# Altium PCB attenuator-pcb.PcbDoc
Units mm, origin at the board's own origin, x right, y up, seen from the top; angles counter-clockwise.
Board outline 98.3 x 99.06 mm, 2 copper layers (Top Layer, Bottom Layer), stack 1.56 mm thick; 55 components, 37 nets, 185 pads, 214 vias.
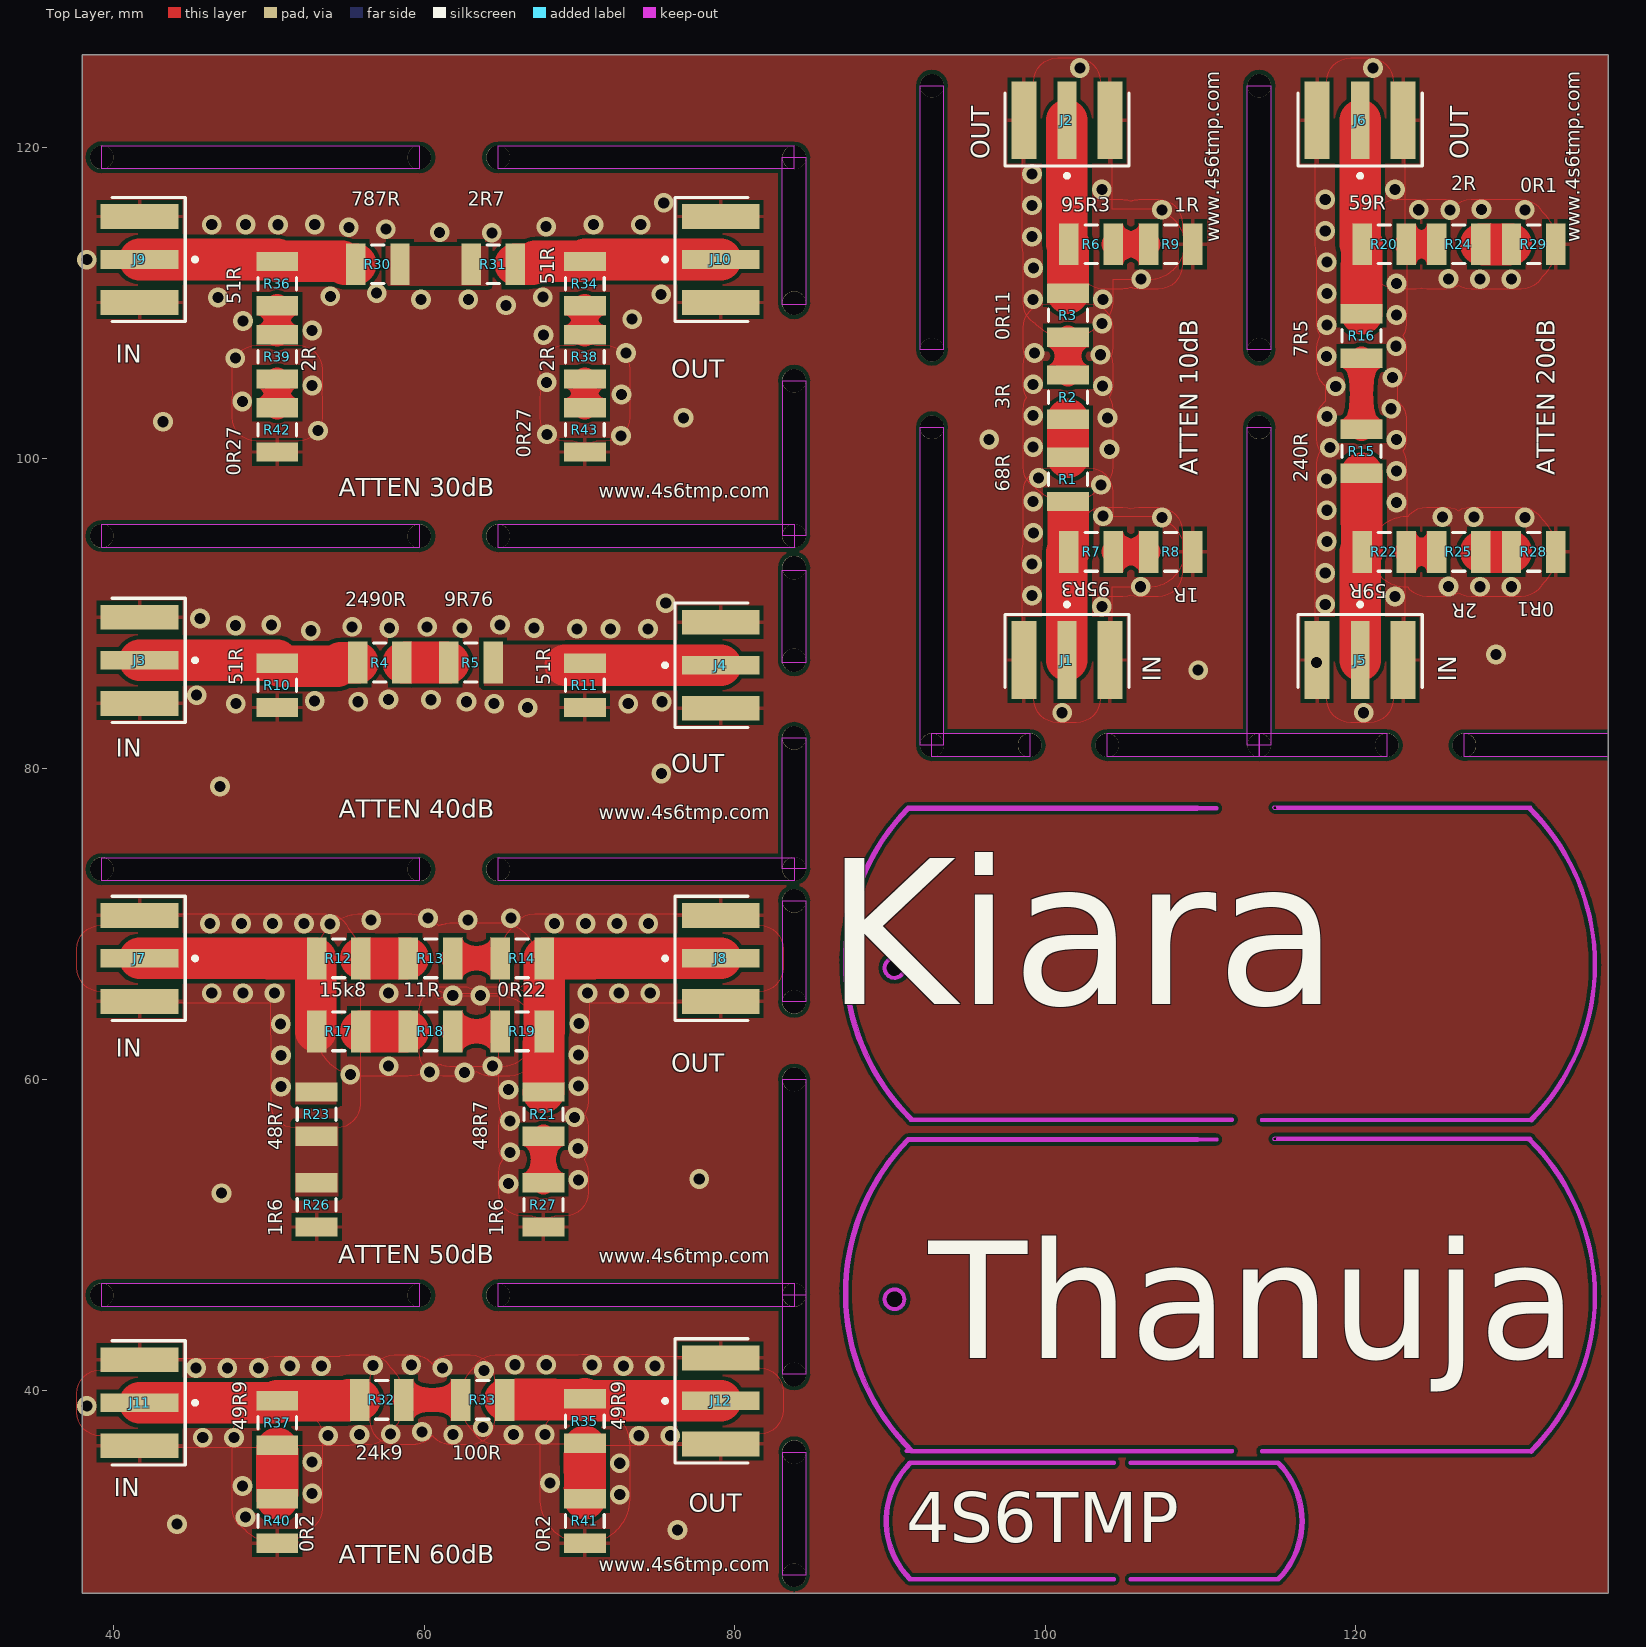
[diagram p0: Top Layer view]
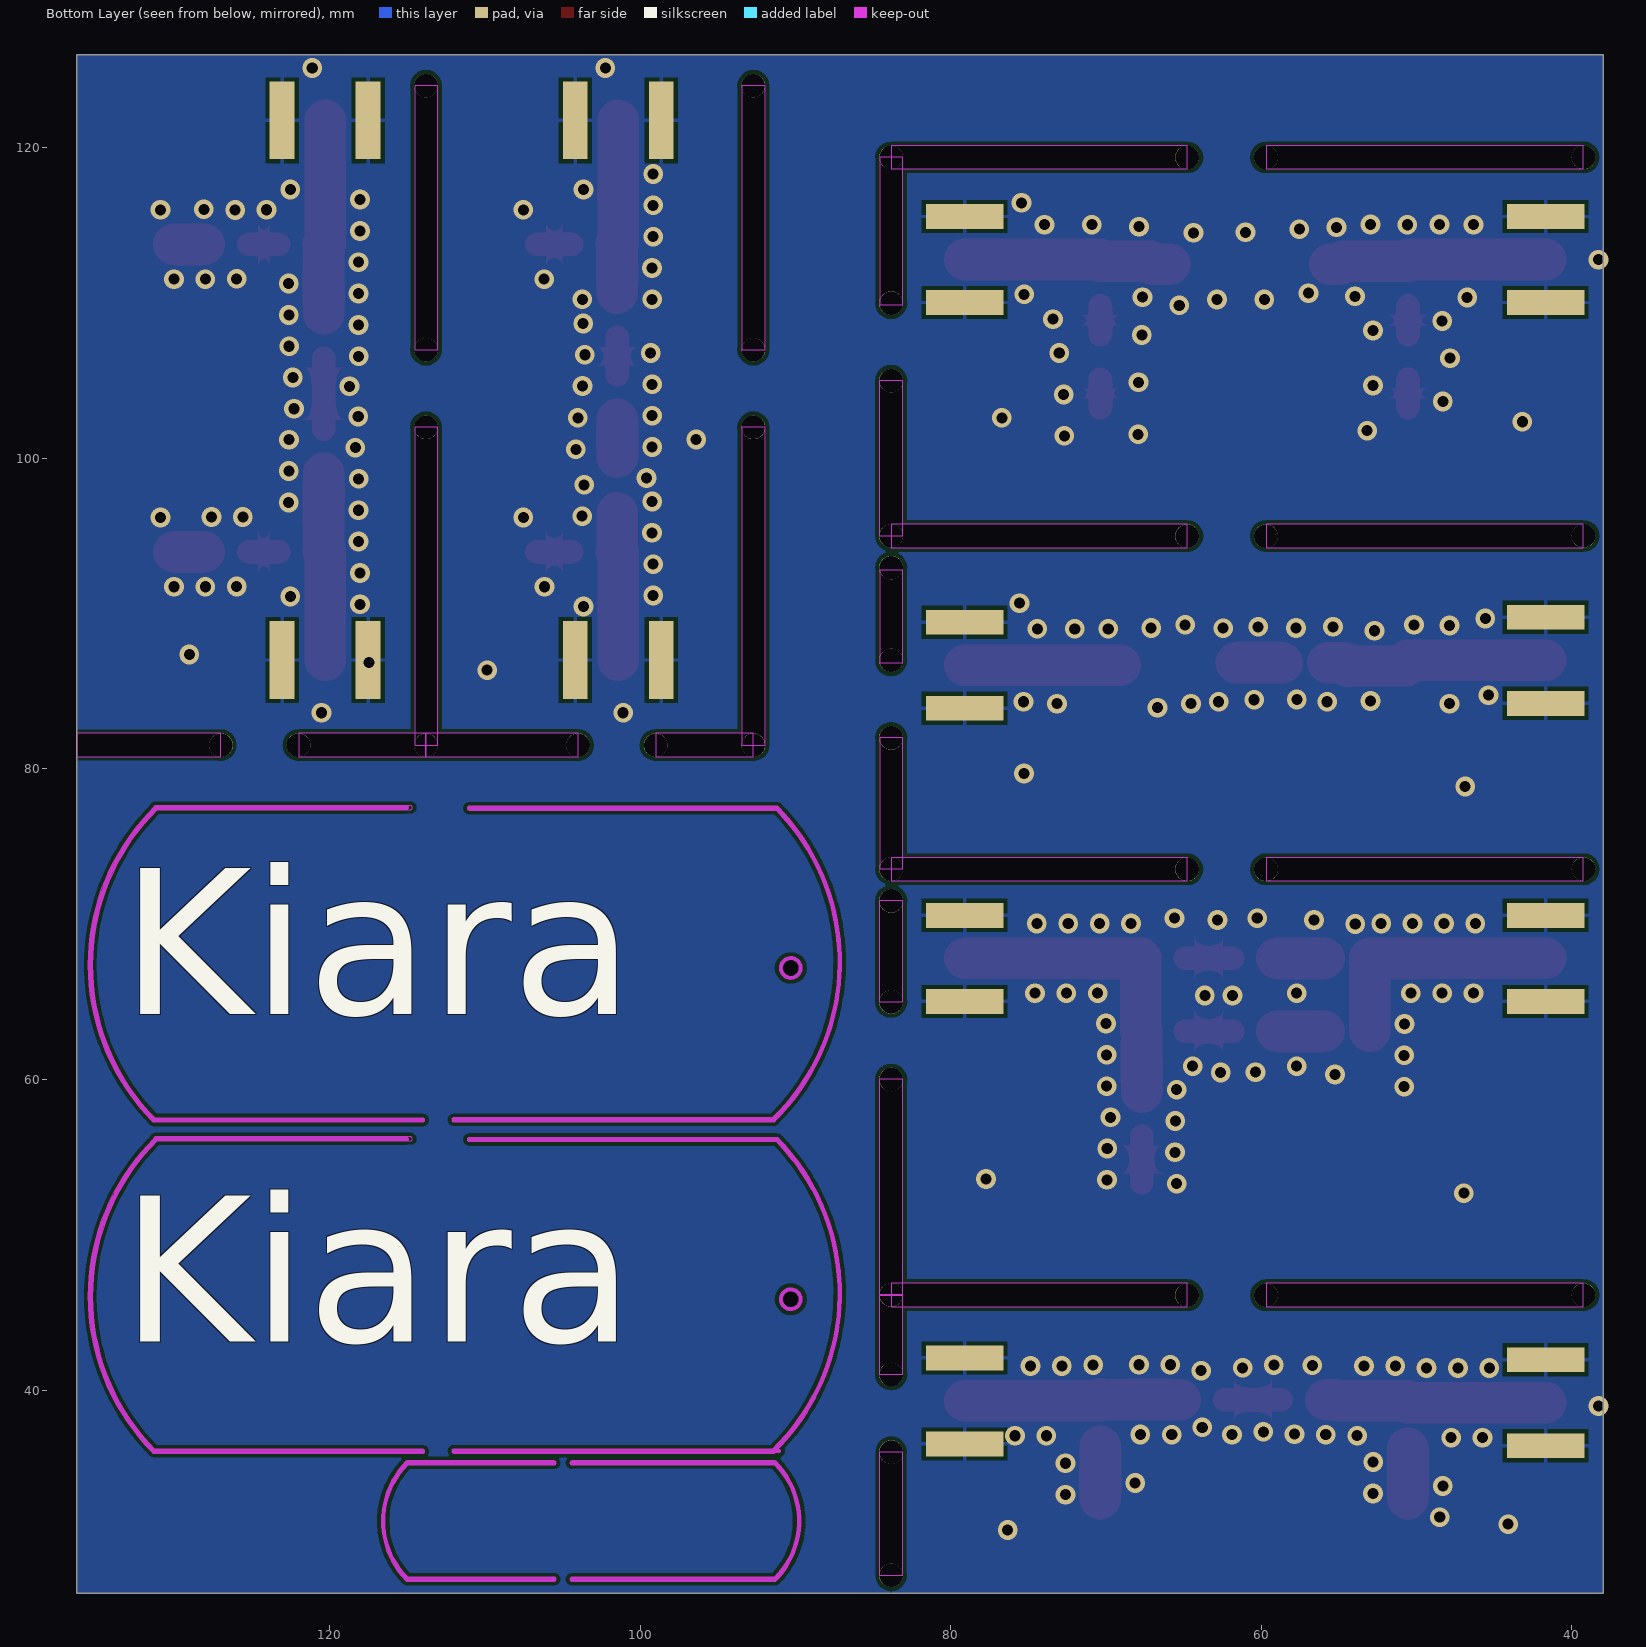
[diagram p1: Bottom Layer view, seen from below]

## Layer stack, top to bottom
Top Solder: solder mask 0.0203, Solder Resist, Dk 3.8
Top Layer: signal copper 0.035
Prepreg 7628: dielectric 1.49, FR-4, Dk 4.6
Bottom Layer: signal copper 0.035
Bottom Solder: solder mask 0.0203, Solder Resist, Dk 3.8

## Board outline
37.973,26.924 136.271,26.924 136.271,125.984 37.973,125.984
cut-out: 84.594,60 84.594,46.113 83.094,46.113 83.094,60
cut-out: 84.582,82 84.582,73.557 83.082,73.557 83.082,82
cut-out: 84.582,119.392 84.582,109.884 83.082,109.884 83.082,119.392
cut-out: 105.537,27.686 cw(c105.537,27.813) 105.537,27.94 114.947,27.94 ccw(c111.254,31.559) 116.424,31.559 ccw(c111.254,31.559) 114.947,35.179 105.537,35.179 cw(c105.537,35.306) 105.537,35.433 115,35.433 cw(c115,35.306) 115.09,35.396 cw(c111.254,31.559) 116.679,31.559 cw(c111.254,31.559) 115.09,27.723 cw(c115,27.813) 115,27.686
cut-out: 91.223,27.723 cw(c95.059,31.559) 91.223,35.396 cw(c91.313,35.306) 91.313,35.433 104.394,35.433 cw(c104.394,35.306) 104.521,35.306 cw(c104.394,35.306) 104.394,35.179 91.366,35.179 ccw(c95.059,31.559) 91.366,27.94 104.394,27.94 cw(c104.394,27.813) 104.521,27.813 cw(c104.394,27.813) 104.394,27.686 91.313,27.686 cw(c91.313,27.813)
cut-out: 91.334,35.977 cw(c101.337,46.219) 91.095,56.223 cw(c91.186,56.134) 91.313,56.134 cw(c91.186,56.134) 91.277,56.045 ccw(c101.337,46.219) 91.512,36.159 cw(c91.423,36.068) 91.55,36.068 cw(c91.423,36.068)
cut-out: 91.334,35.977 cw(c101.337,46.219) 91.095,56.223 cw(c91.186,56.134) 91.313,56.134 cw(c91.186,56.134) 91.277,56.045 ccw(c101.337,46.219) 91.512,36.159 cw(c91.423,36.068) 91.55,36.068 cw(c91.423,36.068)
cut-out: 131.227,36.158 ccw(c131.318,36.068) 131.409,35.979 ccw(c121.221,46.038) 135.538,46.038 ccw(c121.221,46.038) 131.28,56.225 ccw(c131.191,56.134) 131.102,56.043 cw(c121.221,46.038) 135.283,46.038 cw(c121.221,46.038)
cut-out: 91.186,56.007 109.8,56.007 ccw(c109.8,56.134) 109.927,56.134 ccw(c109.8,56.134) 109.8,56.261 91.186,56.261 ccw(c91.186,56.134)
cut-out: 114.8,56.044 cw(c114.8,56.171) 114.8,56.298 131.209,56.298 cw(c131.209,56.171) 131.337,56.171 cw(c131.209,56.171) 131.209,56.044
cut-out: 91.265,36.045 cw(c101.337,46.219) 91.095,56.223 cw(c91.186,56.134) 91.186,56.261 111,56.261 cw(c111,56.134) 111.127,56.134 cw(c111,56.134) 111,56.007 91.24,56.007 ccw(c101.337,46.219) 91.475,36.195 112.004,36.195 cw(c112.004,36.068) 112.131,36.068 cw(c112.004,36.068) 112.004,35.941 91.39,35.941 cw(c91.39,36.068)
cut-out: 114,35.926 cw(c114,36.053) 114,36.18 131.318,36.18 cw(c131.318,36.053) 131.445,36.053 cw(c131.318,36.053) 131.318,35.926
cut-out: 89.662,45.847 ccw(c90.297,45.847) 90.297,45.212 ccw(c90.297,45.847) 90.932,45.847 ccw(c90.297,45.847) 90.297,46.482 ccw(c90.297,45.847)
cut-out: 89.662,67.183 ccw(c90.297,67.183) 90.297,66.548 ccw(c90.297,67.183) 90.932,67.183 ccw(c90.297,67.183) 90.297,67.818 ccw(c90.297,67.183)
cut-out: 114,57.262 cw(c114,57.389) 114,57.516 131.318,57.516 cw(c131.318,57.389) 131.445,57.389 cw(c131.318,57.389) 131.318,57.262
cut-out: 91.265,57.381 cw(c101.337,67.555) 91.095,77.559 cw(c91.186,77.47) 91.186,77.597 111,77.597 cw(c111,77.47) 111.127,77.47 cw(c111,77.47) 111,77.343 91.24,77.343 ccw(c101.337,67.555) 91.475,57.531 112.004,57.531 cw(c112.004,57.404) 112.131,57.404 cw(c112.004,57.404) 112.004,57.277 91.39,57.277 cw(c91.39,57.404)
cut-out: 114.8,77.38 cw(c114.8,77.507) 114.8,77.634 131.209,77.634 cw(c131.209,77.507) 131.337,77.507 cw(c131.209,77.507) 131.209,77.38
cut-out: 91.186,77.343 109.8,77.343 ccw(c109.8,77.47) 109.927,77.47 ccw(c109.8,77.47) 109.8,77.597 91.186,77.597 ccw(c91.186,77.47)
cut-out: 131.227,57.494 ccw(c131.318,57.404) 131.409,57.315 ccw(c121.221,67.374) 135.538,67.374 ccw(c121.221,67.374) 131.28,77.561 ccw(c131.191,77.47) 131.102,77.379 cw(c121.221,67.374) 135.283,67.374 cw(c121.221,67.374)
cut-out: 91.334,57.313 cw(c101.337,67.555) 91.095,77.559 cw(c91.186,77.47) 91.313,77.47 cw(c91.186,77.47) 91.277,77.381 ccw(c101.337,67.555) 91.512,57.495 cw(c91.423,57.404) 91.55,57.404 cw(c91.423,57.404)
cut-out: 91.334,57.313 cw(c101.337,67.555) 91.095,77.559 cw(c91.186,77.47) 91.313,77.47 cw(c91.186,77.47) 91.277,77.381 ccw(c101.337,67.555) 91.512,57.495 cw(c91.423,57.404) 91.55,57.404 cw(c91.423,57.404)
cut-out: 91.397,36.094
cut-out: 91.397,57.43
cut-out: 84.594,46.125 84.594,41 83.094,41 83.094,46.125
cut-out: 104,82.296 113.792,82.296 113.792,80.796 104,80.796
cut-out: 113.792,82.296 122,82.296 122,80.796 113.792,80.796
cut-out: 127,82.296 136.271,82.296 136.271,80.796 127,80.796
cut-out: 92.71,82.296 99,82.296 99,80.796 92.71,80.796
cut-out: 84.594,36 84.594,28.067 83.094,28.067 83.094,36
cut-out: 84.594,71.501 84.594,65 83.094,65 83.094,71.501
cut-out: 84.582,92.795 84.582,86.826 83.082,86.826 83.082,92.795
cut-out: 84.594,105 84.594,95.02 83.094,95.02 83.094,105
cut-out: 113.03,81.534 113.03,102 114.53,102 114.53,81.534
cut-out: 113.03,107 113.03,124 114.53,124 114.53,107
cut-out: 91.948,81.534 91.948,102 93.448,102 93.448,81.534
cut-out: 91.948,107 91.948,124 93.448,124 93.448,107
cut-out: 39.243,46.863 59.69,46.863 59.69,45.363 39.243,45.363
cut-out: 64.77,46.863 83.832,46.863 83.832,45.363 64.77,45.363
cut-out: 39.243,74.295 59.69,74.295 59.69,72.795 39.243,72.795
cut-out: 64.77,74.295 83.832,74.295 83.832,72.795 64.77,72.795
cut-out: 39.243,95.758 59.69,95.758 59.69,94.258 39.243,94.258
cut-out: 64.77,95.758 83.832,95.758 83.832,94.258 64.77,94.258
cut-out: 64.77,120.142 83.82,120.142 83.82,118.642 64.77,118.642
cut-out: 39.243,120.142 59.69,120.142 59.69,118.642 39.243,118.642

## Design rules (kind name [scope] priority, off if disabled: settings)
Clearance [All] p1: gap=0.254 ignorepadtopadclearanceinfootprint=FALSE except(0: Arc-Hole Track-Hole SMDPad-Hole THPad-Hole Via-Hole Fill-Hole Poly-Hole Region-Hole Text-Hole)
HoleToHoleClearance [All] p1: gap=0.1 allowstackedmicrovias=TRUE
MinimumSolderMaskSliver [All] p1 off: minsoldermaskwidth=0.1
PolygonConnect [All] p1: connectstyle=Relief reliefconductorwidth=0.254 reliefentries=4 polygonreliefangle="90 Angle" airgapwidth=0.254
RoomDefinition schematic [InComponentClass('schematic')] p1: confinementstyle=ConfineIn formatcopy=TRUE lockcomponents=FALSE outline 28.829,26.779 136.271,26.779 136.271,135.128 28.829,135.128
RoutingVias [All] p1: holewidth=0.711 width=1.27 viastyle="Through Hole" minholewidth=0.711 minwidth=1.27 maxholewidth=0.711 maxwidth=1.27
SolderMaskExpansion [All] p1: expansion=0.102 istentingtop=FALSE
Width [All] p1: maxlimit=3 minlimit=1.5 preferedwidth=2.673 impedanceprofiledriven=TRUE impedanceprofileid={88FF0C83-8680-40BB-AEE6-F79FA2882ED4} impedanceprofilevalue=50.000000 minimp=50.000000 maximp=50.000000 favimp=50.000000
Width Width_1 [All] p2: maxlimit=2 minlimit=0.254 preferedwidth=1 minimp=50.000000 maximp=50.000000 favimp=50.000000
28 further rules are at their usual default settings.

## Components (designator, comment, footprint, x,y, rotation, side; value= is the part's Value field where it differs from the comment)
J1 "IN" FP-CON-SMA-EDGE-S-MFG 101.405,79.756 r180 top
J2 "OUT" FP-CON-SMA-EDGE-S-MFG 101.405,129.032 r0 top
J3 "IN" FP-CON-SMA-EDGE-S-MFG 34.417,86.995 r90 top
J4 "OUT" FP-CON-SMA-EDGE-S-MFG 86.36,86.679 r270 top
J5 "IN" FP-CON-SMA-EDGE-S-MFG 120.285,79.756 r180 top
J6 "OUT" FP-CON-SMA-EDGE-S-MFG 120.285,129.032 r0 top
J7 "IN" FP-CON-SMA-EDGE-S-MFG 34.417,67.8 r90 top
J8 "OUT" FP-CON-SMA-EDGE-S-MFG 86.36,67.8 r270 top
J9 "IN" FP-CON-SMA-EDGE-S-MFG 34.417,112.811 r90 top
J10 "OUT" FP-CON-SMA-EDGE-S-MFG 86.36,112.811 r270 top
J11 "IN" FP-CON-SMA-EDGE-S-MFG 34.417,39.175 r90 top
J12 "OUT" FP-CON-SMA-EDGE-S-MFG 86.36,39.298 r270 top
R1 "68R" RESC3225X70X50NL20T20 101.473,98.651 r90 top
R2 "3R" RESC3225X70X50NL20T20 101.473,103.95 r90 top
R3 "0R11" RESC3225X70X50NL20T20 101.473,109.22 r90 top
R4 "2490R" RESC3225X70X50NL20T20 57.15,86.851 r0 top
R5 "9R76" RESC3225X70X50NL20T20 63.02,86.851 r0 top
R6 "95R3" RESC3225X70X50NL20T20 102.957,113.792 r180 top
R7 "95R3" RESC3225X70X50NL20T20 102.957,93.98 r180 top
R8 "1R" RESC3225X70X50NL20T20 108.091,93.98 r180 top
R9 "1R" RESC3225X70X50NL20T20 108.091,113.792 r180 top
R10 "51R" RESC3225X70X50NL20T20 50.546,85.381 r90 top
R11 "51R" RESC3225X70X50NL20T20 70.358,85.381 r90 top
R12 "15k8" RESC3225X70X50NL20T20 54.511,67.8 r0 top
R13 "11R" RESC3225X70X50NL20T20 60.417,67.8 r0 top
R14 "0R22" RESC3225X70X50NL20T20 66.322,67.8 r0 top
R15 "240R" RESC3225X70X50NL20T20 120.376,100.457 r90 top
R16 "7R5" RESC3225X70X50NL20T20 120.376,107.888 r90 top
R17 "15k8" RESC3225X70X50NL20T20 54.511,63.101 r0 top
R18 "11R" RESC3225X70X50NL20T20 60.417,63.101 r0 top
R19 "0R22" RESC3225X70X50NL20T20 66.322,63.101 r0 top
R20 "59R" RESC3225X70X50NL20T20 121.837,113.792 r180 top
R21 "48R7" RESC3225X70X50NL20T20 67.691,57.767 r90 top
R22 "59R" RESC3225X70X50NL20T20 121.837,93.98 r180 top
R23 "48R7" RESC3225X70X50NL20T20 53.086,57.767 r90 top
R24 "2R" RESC3225X70X50NL20T20 126.635,113.792 r180 top
R25 "2R" RESC3225X70X50NL20T20 126.635,93.98 r180 top
R26 "1R6" RESC3225X70X50NL20T20 53.086,51.925 r90 top
R27 "1R6" RESC3225X70X50NL20T20 67.691,51.925 r90 top
R28 "0R1" RESC3225X70X50NL20T20 131.461,93.98 r180 top
R29 "0R1" RESC3225X70X50NL20T20 131.461,113.792 r180 top
R30 "787R" RESC3225X70X50NL20T20 57.023,112.506 r0 top
R31 "2R7" RESC3225X70X50NL20T20 64.454,112.506 r0 top
R32 "24k9" RESC3225X70X50NL20T20 57.277,39.37 r0 top
R33 "100R" RESC3225X70X50NL20T20 63.782,39.37 r0 top
R34 "51R" RESC3225X70X50NL20T20 70.358,111.259 r90 top
R35 "49R9" RESC3225X70X50NL20T20 70.358,38 r90 top
R36 "51R" RESC3225X70X50NL20T20 50.546,111.259 r90 top
R37 "49R9" RESC3225X70X50NL20T20 50.546,37.877 r90 top
R38 "2R" RESC3225X70X50NL20T20 70.358,106.537 r90 top
R39 "2R" RESC3225X70X50NL20T20 50.546,106.537 r90 top
R40 "0R2" RESC3225X70X50NL20T20 50.546,31.564 r90 top
R41 "0R2" RESC3225X70X50NL20T20 70.358,31.564 r90 top
R42 "0R27" RESC3225X70X50NL20T20 50.546,101.838 r90 top
R43 "0R27" RESC3225X70X50NL20T20 70.358,101.838 r90 top

## Footprints (in the part's own frame and the unit in brackets; to place one, negate y for a bottom-side part, rotate by r counter-clockwise, add the part's x,y. Pads: shape width x height; smd on the part's side, far side on the other; paste and mask are expansions set on the pad)
FP-CON-SMA-EDGE-S-MFG [mm]
  rect 1.2x5 smd paste+0 mask+0: 1(0,-7.26)
  rect 1.6x5 smd paste+0 mask+0: 2(-2.77,-7.26) 3(2.77,-7.26)
  rect 1.6x5 smd far side paste+0 mask+0: 4(-2.77,-7.26) 5(2.77,-7.26)
  silkscreen extent -4,-10.96 4,-5.5, body extent -3.67,-9.86 3.67,4.86, height 0.25
RESC3225X70X50NL20T20 [mm] "Chip Resistor, 2-Leads, Body 3.20x2.50mm, IPC Medium Density"
  rect 1.25x2.7 smd: 1(-1.425,0) 2(1.425,0)
  silkscreen extent -0.4,-1.25 0.4,1.25, body extent -1.7,-1.35 1.7,1.35, height 0.7

## Part data
J1 J2 J3 J4 J5 J6 J7 J8 J9 J10 J11 J12: library part CMP-204357-000001-1, "CONN SMA JACK STR EDGE MNT", Frequency=18GHz, Manufacturer="RF Solutions Ltd.", Manufacturer Part Number=CON-SMA-EDGE-S, Package=CONN_JACK, Automotive=No, Category=Conn, ComponentLink2Description=Datasheet, ComponentLink2URL=https://www.rfsolutions.co.uk/downloads/1498648656DS-CON-EDGE-SMA-4.pdf, Conn Orientation="Right Angle", Contact Material=Gold, Device Class L1=Connectors, Device Class L2="RF / Coaxial Connectors", Device Class L3=unset, Digikey Description="CONN SMA JACK STR EDGE MNT", Footprint Url=https://forum.upverter.com/uploads/default/original/3X/b/e/be75b907af57498775929d6d9099689c472e0307.pdf, Height=6.35mm, Impedance=50Ω, Is Female=yes, Lead Free=Yes, Number Of Contacts=1, Octopart=https://octopart.com/con-sma-edge-s-rf+solutions-70967450, RoHS=TRUE, Shielding=true
R1 R2 R3 R4 R5 R6 R7 R8 R9 R10 R11 R12 R13 R14 R15 R16 R17 R18 R19 R20 R21 R22 R23 R24 R25 R26 R27 R28 R29 R30 R31 R32 R33 R34 R35 R36 R37 R38 R39 R40 R41 R42 R43: library part CMP-2005-01957-1, Manufacturer=Panasonic, Part Number=ERJ-14NF1001U

## Free pads (board coordinates)
  round 1.524 hole 1.524 unplated mask+0: 5(39.243,46.113) 5(39.243,73.545) 5(39.243,95.008) 5(39.243,119.392) 5(59.69,46.101) 5(59.69,73.533) 5(59.69,94.996) 5(59.69,119.38) 5(64.77,46.101) 5(64.77,73.533) 5(64.77,94.996) 5(64.77,119.38) 5(83.832,28.067) 5(83.832,36) 5(83.832,41) 5(83.832,46.125) 5(83.832,60) 5(83.832,65) 5(83.832,71.501) 5(83.832,73.557) 5(83.832,82) 5(83.832,87) 5(83.832,92.964) 5(83.832,95.02) 5(83.832,105) 5(83.832,110) 5(83.832,119.38) 5(92.71,81.534) 5(92.71,102) 5(92.71,107) 5(92.71,124) 5(99,81.534) 5(104,81.534) 5(113.792,81.534) 5(113.792,102) 5(113.792,107) 5(113.792,124) 5(122,81.534) 5(127,81.534)

## Via types
v1: diameter 1.27, hole 0.711, Top Layer to Bottom Layer, 214 vias

## Nets (pads, with @x,y where several pads share a name; then routed paths per layer and width w, separated by ;. In a path a pad name is that pad's centre, name@x,y a point inside that pad or via, vN(x,y) a via of type N, cw(c..) or ccw(c..) an arc to the next point about the centre after c; other vN are vias at no path point)
GND: J1.2 J1.3 J1.4 J1.5 J2.2 J2.3 J2.4 J2.5 J3.2 J3.3 J3.4 J3.5 J4.2 J4.3 J4.4 J4.5 J5.2 J5.3 J5.4 J5.5 J6.2 J6.3 J6.4 J6.5 J7.2 J7.3 J7.4 J7.5 J8.2 J8.3 J8.4 J8.5 J9.2 J9.3 J9.4 J9.5 J10.2 J10.3 J10.4 J10.5 J11.2 J11.3 J11.4 J11.5 J12.2 J12.3 J12.4 J12.5 R8.1 R9.1 R10.1 R11.1 R26.1 R27.1 R28.1 R29.1 R40.1 R41.1 R42.1 R43.1
  other v1: 76.327,30.988 44.091,31.362 48.5,31.812 72.603,33.262 52.793,33.342 48.301,33.822 68.113,34.007 72.603,35.282 52.791,35.362 45.747,36.931 47.767,36.931 53.823,37.057 73.84,37.054 75.86,37.054 55.842,37.123 61.875,37.123 65.761,37.123 67.781,37.139 57.849,37.153 59.863,37.308 63.797,37.593 38.28,38.974 63.866,41.247 45.308,41.42 47.328,41.42 49.348,41.42 61.194,41.431 51.364,41.547 53.384,41.547 72.843,41.543 74.863,41.543 56.709,41.586 59.183,41.617 70.824,41.616 65.849,41.628 67.869,41.628 46.95,52.675 65.444,53.292 69.938,53.535 77.724,53.594 65.548,55.309 69.916,55.554 65.529,57.329 69.704,57.563 65.444,59.347 50.792,59.535 69.949,59.568 55.253,60.326 62.611,60.452 60.363,60.473 57.717,60.856 64.415,60.854 50.792,61.555 69.949,61.588 50.764,63.575 69.992,63.608 61.849,65.405 63.627,65.405 46.326,65.555 48.346,65.555 50.366,65.555 57.717,65.555 70.529,65.555 72.549,65.555 74.569,65.555 53.943,70.016 46.211,70.045 48.231,70.045 50.251,70.045 52.271,70.045 68.387,70.045 70.407,70.045 72.427,70.045 74.447,70.045 56.596,70.277 62.821,70.276 60.253,70.387 65.587,70.387 46.863,78.867 75.28,79.705 101.095,83.619 120.514,83.619 66.675,83.947 47.879,84.201 64.516,84.201 73.152,84.201 55.753,84.328 62.738,84.328 75.311,84.328 52.955,84.369 60.452,84.455 57.705,84.477 45.359,84.75 109.855,86.36 117.475,86.868 129.032,87.376 52.705,88.9 69.85,89.027 72.009,89.027 74.422,89.027 57.764,89.073 62.452,89.067 67.09,89.082 55.372,89.154 60.198,89.154 47.867,89.24 50.165,89.281 64.897,89.281 45.567,89.688 103.65,90.469 118.041,90.605 75.565,90.678 122.53,91.108 99.161,91.171 106.157,91.733 125.986,91.753 128.006,91.733 130.026,91.733 118.041,92.625 99.161,93.191 118.145,94.642 99.242,95.209 107.523,96.196 130.893,96.196 125.59,96.227 127.61,96.227 103.731,96.279 118.145,96.662 122.635,97.166 99.226,97.229 103.601,98.295 118.13,98.682 99.584,98.744 122.623,99.186 104.14,100.584 118.34,100.691 99.228,100.733 122.616,101.206 96.393,101.219 72.678,101.456 67.922,101.551 53.174,101.784 43.18,102.362 76.708,102.616 104.013,102.616 118.156,102.703 99.226,102.753 122.286,103.198 48.299,103.671 72.718,104.117 103.708,104.661 118.718,104.643 52.793,104.695 99.226,104.773 67.898,104.899 122.37,105.217 47.847,106.458 118.13,106.576 103.564,106.675 73.006,106.786 99.318,106.791 122.605,107.223 67.691,107.95 52.793,108.233 118.142,108.596 103.672,108.693 48.343,108.852 73.406,108.966 122.627,109.243 65.278,109.855 59.801,110.228 62.849,110.228 99.226,110.242 103.72,110.245 46.736,110.363 67.652,110.383 53.964,110.439 75.268,110.566 118.145,110.616 56.951,110.645 122.635,111.263 106.184,111.545 125.986,111.565 128.006,111.545 130.026,111.545 99.242,112.262 118.145,112.636 38.28,112.802 99.161,114.28 64.367,114.531 61.007,114.562 118.041,114.653 57.542,114.763 55.157,114.879 67.866,114.929 50.591,115.048 46.325,115.055 48.514,115.062 52.959,115.062 70.908,115.055 73.956,115.055 107.523,116.008 126.084,116.001 130.893,116.008 124.064,116.015 128.104,116.039 99.161,116.3 75.438,116.459 118.041,116.673 103.65,117.32 122.53,117.32 99.161,118.32 102.238,125.138 121.118,125.138
NetJ1_1: J1.1 R1.1 R7.2 | length 9.6
  Top Layer w2.673: J1.1 101.405,93.966 101.419,93.98 R7.2@101.5,93.98 ; 101.487,96.515 101.487,93.994 R7.2@101.5,93.98 ; R7.2 R7.2@101.5,93.98
NetJ2_1: J2.1 R3.2 R6.2 | length 11.3
  Top Layer w2.673: J2.1 101.405,113.806 101.419,113.792 R6.2@101.5,113.792 ; R3.2 101.487,110.658 101.487,113.778 R6.2@101.5,113.792 ; R6.2 R6.2@101.5,113.792
NetJ3_1: J3.1 R4.1 R10.2 | length 14.4
  Top Layer w2.673: J3.1 50.532,86.995 50.546,86.981 50.546,86.824 R10.2 50.738,86.614 54.397,86.614 54.62,86.837 55.711,86.837 R4.1
NetJ4_1: J4.1 R5.2 R11.2 | length 10
  Top Layer w2.673: R11.2@69.088,86.679 J4.1
NetJ5_1: J5.1 R15.1 R22.2 | length 12.1
  Top Layer w2.673: J5.1 120.285,93.966 120.299,93.98 R22.2@120.403,93.98 ; R15.1 120.39,99.018 120.39,93.994 R22.2@120.403,93.98 ; R22.2 R22.2@120.403,93.98
NetJ6_1: J6.1 R16.2 R20.2 | length 12.6
  Top Layer w2.673: J6.1 120.285,113.806 120.299,113.792 R20.2@120.403,113.792 ; R16.2 120.39,109.326 120.39,113.778 R20.2@120.403,113.792 ; R20.2 R20.2@120.403,113.792
NetJ7_1: J7.1 R12.1 R17.1 R23.2 | length 16
  Top Layer w2.673: J7.1 52.995,67.8 53.009,67.786 R17.1@53.009,63.114
NetJ8_1: J8.1 R14.2 R19.2 R21.2 | length 20
  Top Layer w2.673: R21.2 67.705,59.205 67.705,63.087 67.718,63.101 R19.2 R14.2 J8.1
NetJ9_1: J9.1 R30.1 R36.2 | length 14
  Top Layer w2.673: J9.1 50.532,112.811 R36.2@50.546,112.797 ; R36.2 54.722,112.684 54.9,112.506 R30.1
NetJ10_1: J10.1 R31.2 R34.2 | length 13.4
  Top Layer w2.673: R31.2 65.893,112.519 66.984,112.519 67.148,112.684 R34.2 70.358,112.797 70.372,112.811 J10.1
NetJ11_1: J11.1 R32.1 R37.2 | length 14.3
  Top Layer w2.673: J11.1 50.532,39.175 50.546,39.189 R37.2 55.086,39.302 55.154,39.37 R32.1
NetJ12_1: J12.1 R33.2 R35.2 | length 14
  Top Layer w2.673: R33.2 65.22,39.384 70.344,39.384 R35.2@70.358,39.397 ; R35.2 R35.2@70.358,39.397 ; J12.1 70.372,39.298 70.358,39.312 R35.2@70.358,39.397
NetR1_2: R1.2 R2.1 | length 2.4
  Top Layer w2.673: R1.2 R2.1
NetR2_2: R2.2 R3.1 | length 2.4
  Top Layer w1.5: R2.2 R3.1
NetR4_2: R4.2 R5.1 | length 2.9
  Top Layer w2.673: R4.2@58.652,86.851 R5.1
NetR6_1: R6.1 R9.2 | length 2.3
  Top Layer w1.5: R6.1 R9.2
NetR7_1: R7.1 R8.2 | length 2.3
  Top Layer w1.5: R7.1 R8.2
NetR12_2: R12.2 R13.1 | length 3.1
  Top Layer w2.673: R12.2 R13.1
NetR13_2: R13.2 R14.1 | length 3.1
  Top Layer w1.5: R13.2 R14.1
NetR15_2: R15.2 R16.1 | length 4.6
  Top Layer w1.5: R15.2 R16.1
NetR17_2: R17.2 R18.1 | length 3.1
  Top Layer w2.673: R17.2 R18.1
NetR18_2: R18.2 R19.1 | length 3.1
  Top Layer w1.5: R18.2 R19.1
NetR20_1: R20.1 R24.2 | length 1.9
  Top Layer w1.5: R20.1 R24.2
NetR21_1: R21.1 R27.2 | length 3
  Top Layer w1.5: R27.2 R21.1
NetR22_1: R22.1 R25.2 | length 1.9
  Top Layer w1.5: R22.1 R25.2
NetR23_1: R23.1 R26.2
NetR24_1: R24.1 R29.2 | length 2
  Top Layer w2.673: R24.1 R29.2
NetR25_1: R25.1 R28.2 | length 2
  Top Layer w2.673: R25.1 R28.2
NetR30_2: R30.2 R31.1
NetR32_2: R32.2 R33.1 | length 3.7
  Top Layer w1.5: R32.2 R33.1
NetR34_1: R34.1 R38.2 | length 1.9
  Top Layer w1.5: R38.2 R34.1
NetR35_1: R35.1 R41.2 | length 3.4
  Top Layer w2.673: R41.2 R35.1@70.358,36.371
NetR36_1: R36.1 R39.2 | length 1.9
  Top Layer w1.5: R39.2 R36.1
NetR37_1: R37.1 R40.2 | length 3.3
  Top Layer w2.673: R40.2 R37.1@50.546,36.248
NetR38_1: R38.1 R43.2 | length 1.8
  Top Layer w1.5: R43.2 R38.1
NetR39_1: R39.1 R42.2 | length 1.8
  Top Layer w1.5: R42.2 R39.1

## Polygon pours and split planes (outlines as drawn)
GND on Top Layer "Top Layer-GND" (solid, remove dead copper, pour order 6): 37.973,26.924 136.271,26.924 136.271,125.984 37.973,125.984
GND on Top Layer "Top Layer-GND 14" (solid, pour order 15): 154 vertices, not listed, extent 62.326,36.414 83.136,42.306
GND on Top Layer "Top Layer-GND 2" (solid, pour order 28): 177 vertices, not listed, extent 120.972,91.094 132.917,96.866
GND on Top Layer "Top Layer-GND 3" (solid, pour order 27): 131 vertices, not listed, extent 120.972,110.906 132.917,116.678
GND on Top Layer "Top Layer-GND 4" (solid, pour order 26): 295 vertices, not listed, extent 117.401,82.98 123.293,125.808
GND on Top Layer "Top Layer-GND 5" (solid, pour order 25): 113 vertices, not listed, extent 102.092,110.906 108.956,116.678
GND on Top Layer "Top Layer-GND 6" (solid, pour order 24): 47 vertices, not listed, extent 102.221,91.094 108.828,96.866
GND on Top Layer "Top Layer-GND 7" (solid, pour order 23): 131 vertices, not listed, extent 98.587,97.195 104.359,110.085
GND on Top Layer "Top Layer-GND 8" (solid, pour order 22): 185 vertices, not listed, extent 98.521,82.98 108.956,99.396
GND on Top Layer "Top Layer-GND 9" (solid, pour order 21): 231 vertices, not listed, extent 98.521,107.764 108.956,125.808
GND on Top Layer "Top Layer-GND 10" (solid, pour order 20): 119 vertices, not listed, extent 47.66,30.108 53.432,39.13
GND on Top Layer "Top Layer-GND 11" (solid, pour order 19): 167 vertices, not listed, extent 67.473,30.108 73.243,39.253
GND on Top Layer "Top Layer-GND 12" (solid, pour order 18): 163 vertices, not listed, extent 56.412,36.484 64.647,42.256
GND on Top Layer "Top Layer-GND 13" (solid, pour order 16): 162 vertices, not listed, extent 37.641,36.291 58.733,42.256
GND on Top Layer "Top Layer-GND 15" (solid, pour order 12): 387 vertices, not listed, extent 53.055,60.216 67.187,70.684
GND on Top Layer "Top Layer-GND 16" (solid, pour order 11): 188 vertices, not listed, extent 64.805,51.06 83.136,70.686
GND on Top Layer "Top Layer-GND 17" (solid, pour order 14): 133 vertices, not listed, extent 59.552,60.214 67.187,65.987
GND on Top Layer "Top Layer-GND 18" (solid, pour order 10): 138 vertices, not listed, extent 37.641,56.884 55.894,70.686
GND on Top Layer "Top Layer-GND 19" (solid, pour order 9): 85 vertices, not listed, extent 67.472,100.973 73.244,107.402
GND on Top Layer "Top Layer-GND 1" (solid, pour order 7): 43 vertices, not listed, extent 47.66,101.101 53.432,107.273
NetJ4_1 on Top Layer "NETJ4_1_L01_P005" (solid, remove dead copper, pour order 5): 63.881,88.011 72.136,88.011 72.136,85.344 63.881,85.344
NetJ7_1 on Top Layer "NETJ7_1_L01_P004" (solid, remove dead copper, pour order 4): 54.356,65.151 54.356,58.42 51.689,58.42 51.689,65.151
NetR23_1 on Top Layer "NETR23_1_L01_P003" (solid, remove dead copper, pour order 3): 51.689,57.221 54.483,57.221 54.483,52.471 51.689,52.471
NetR30_2 on Top Layer "NETR30_2_L01_P002" (solid, remove dead copper, pour order 2): 57.531,113.665 64.135,113.665 64.135,111.125 57.531,111.125
GND on Bottom Layer "Top Layer-No Net" (solid, pour order 1): 37.973,26.924 136.271,26.924 136.271,125.984 37.973,125.984

## Keep-outs
Keep-Out Layer:
  circle w0.254: c90.297,45.847 r0.635
  circle w0.254: c90.297,67.183 r0.635
  pour cut-out: 131.227,36.158 ccw(c131.318,36.068) 131.409,35.979 ccw(c121.221,46.038) 135.538,46.038 ccw(c121.221,46.038) 131.28,56.225 ccw(c131.191,56.134) 131.102,56.043 cw(c121.221,46.038) 135.283,46.038 cw(c121.221,46.038)
  pour cut-out: 131.227,57.494 ccw(c131.318,57.404) 131.409,57.315 ccw(c121.221,67.374) 135.538,67.374 ccw(c121.221,67.374) 131.28,77.561 ccw(c131.191,77.47) 131.102,77.379 cw(c121.221,67.374) 135.283,67.374 cw(c121.221,67.374)
  lines w0.254: 91.059,36.068 104.14,36.068 ; 91.39,36.068 112.004,36.068 ; 91.39,57.404 112.004,57.404 ; 91.423,36.068 cw(c101.337,46.219) 91.186,56.134 111,56.134 ; 91.423,57.404 cw(c101.337,67.555) 91.186,77.47 111,77.47 ; 104.394,27.813 91.313,27.813 cw(c95.059,31.559) 91.313,35.306 104.394,35.306 ; 105.537,27.813 115,27.813 ccw(c111.254,31.559) 115,35.306 105.537,35.306 ; 114,36.053 131.318,36.053 ; 114,57.389 131.318,57.389 ; 115,56.171 131.209,56.171 ; 115,77.507 131.209,77.507 ; 131.191,56.134 cw(c121.221,46.038) 131.318,36.068 ; 131.191,77.47 cw(c121.221,67.374) 131.318,57.404

## Silkscreen, mask and mechanical layers (free items; w line width, h text height)
Top Overlay:
  text "www.4s6tmp.com" at 111.489,113.919 h1.52 r90
  text "www.4s6tmp.com" at 134.73,113.919 h1.52 r90
  text "ATTEN 10dB" at 110.222,98.925 h2 r90
  text "ATTEN 20dB" at 133.209,98.925 h2 r90
  text "ATTEN 30dB" at 54.5,97.169 h2
  text "www.4s6tmp.com" at 71.254,97.172 h1.52
  text "ATTEN 40dB" at 54.5,76.468 h2
  text "www.4s6tmp.com" at 71.254,76.471 h1.52
  text "Kiara" at 85.824,60.668 h22
  text "www.4s6tmp.com" at 71.254,47.896 h1.52
  text "ATTEN 50dB" at 54.475,47.766 h2
  text "Thanuja" at 92.5,39.58 h13
  text "4S6TMP" at 91.059,29.144 h5.5
  text "ATTEN 60dB" at 54.5,28.462 h2
  text "www.4s6tmp.com" at 71.254,28.025 h1.52
Bottom Overlay:
  text "Kiara" at 133.458,60 h22
  text "Kiara" at 133.458,38.922 h22

## Dimensions
59.69,119.38 to 64.77,119.38 on Mechanical 1
136.271,26.924 to 136.271,125.984 on Top Assembly
37.973,26.924 to 136.271,26.924 on Top Assembly